# Altium PCB RGB_Plugin_Board.PcbDoc (part 1 of 3)
Units mil, origin at the board's own origin, x right, y up, seen from the top; angles counter-clockwise.
Board outline 2420 x 984.41 mil, 2 copper layers (TOP, BOTTOM), stack 81.54 mil thick; 20 components, 19 nets, 2525 pads, 9 vias.
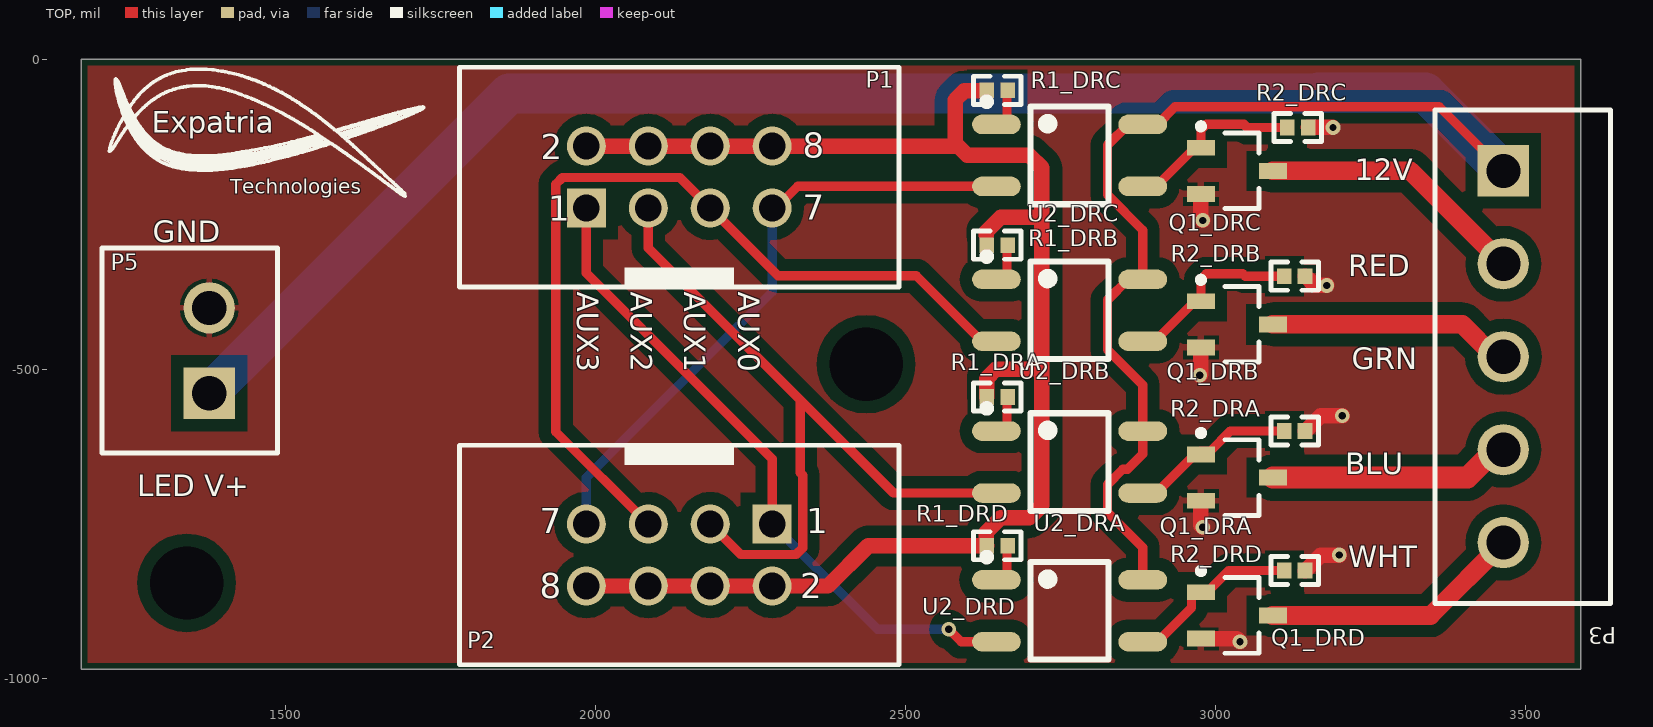
[diagram p0: TOP view]
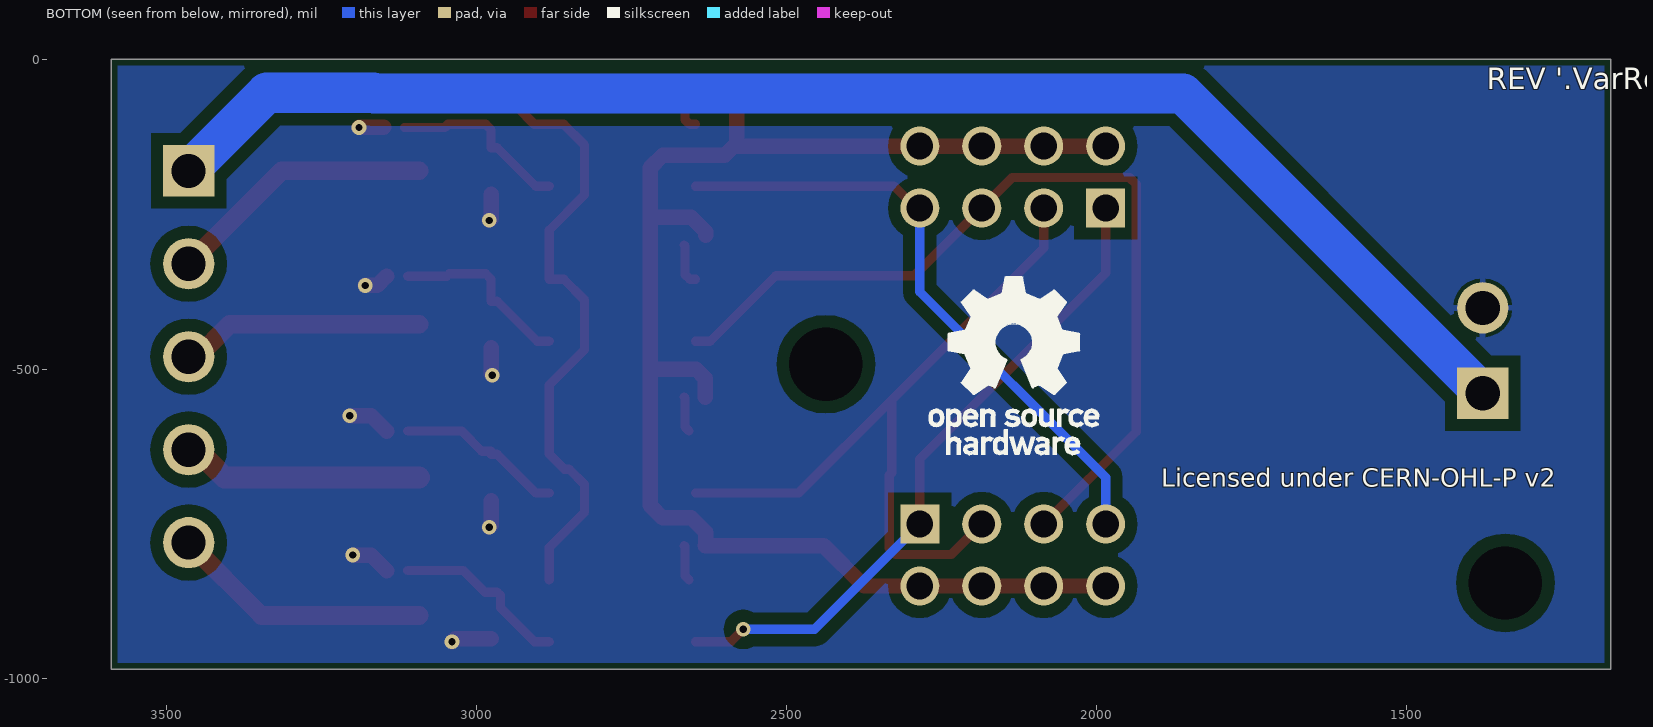
[diagram p1: BOTTOM view, seen from below]
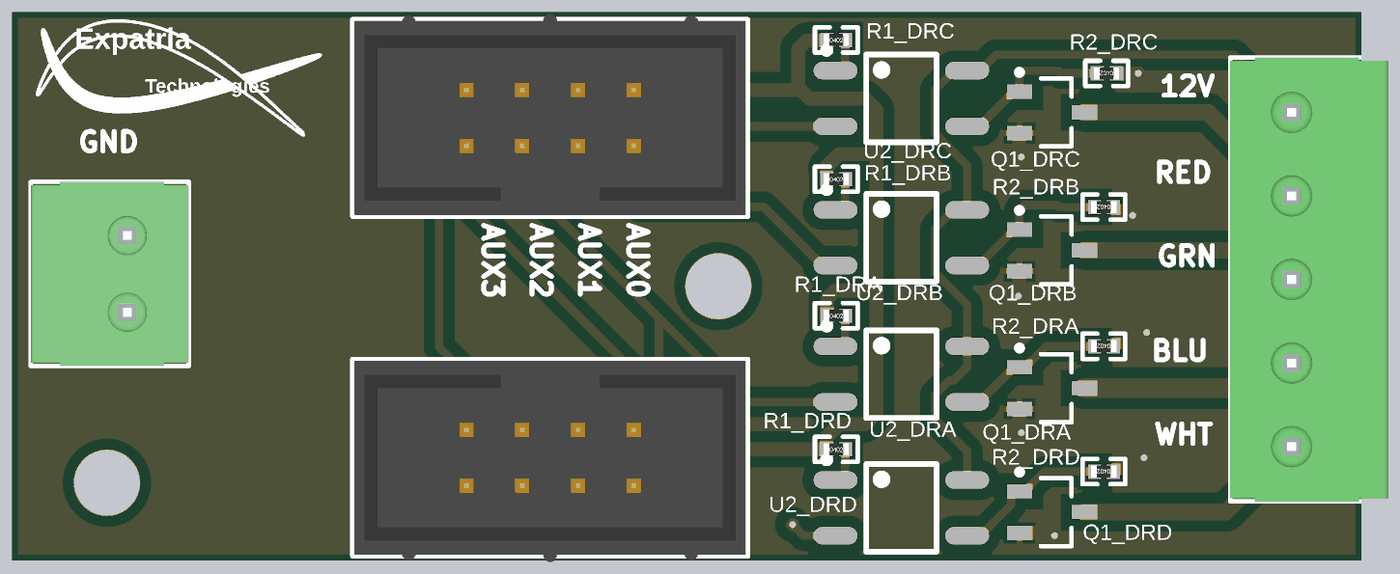
[diagram p4: 3D render of the assembled board from above, using the file's embedded part models]

## Layer stack, top to bottom
Top Solder: solder mask 0.4, Solder Resist, Dk 3.5
TOP: signal copper 1.4
Dielectric 1: core 78.74, FR-4, Dk 4.2
BOTTOM: signal copper 1.4
Bottom Solder: solder mask 0.4, Solder Resist, Dk 3.5

## Board outline
1170,-984.41 1170,0 3590,0 3590,-984.41

## Design rules (kind name [scope] priority, off if disabled: settings)
BoardOutlineClearance "BoardOutlineClearance Mousebites" [InPadClass('Debug_Tab_bites')] p1: gap=0 ignorepadtopadclearanceinfootprint=FALSE
BoardOutlineClearance "BoardOutlineClearance Silk" [(OnLayer('Top Overlay') OR OnLayer('Bottom Overlay'))] p2: gap=0 ignorepadtopadclearanceinfootprint=FALSE
BoardOutlineClearance [All] p3: gap=10 ignorepadtopadclearanceinfootprint=FALSE except(0: Arc-SplitContinuation Track-SplitContinuation SMDPad-SplitContinuation THPad-SplitContinuation Via-SplitContinuation Fill-SplitContinuation Poly-SplitContinuation Region-SplitContinuation Text-SplitContinuation)
Clearance "Fiducial self-clearance" [HasFootprint('Fiducial10-20') vs IsArc] p1: gap=5 ignorepadtopadclearanceinfootprint=TRUE except(0: Arc-SMDPad Arc-THPad Arc-Hole Track-SMDPad Track-THPad Track-Hole SMDPad-SMDPad SMDPad-THPad SMDPad-Hole THPad-THPad THPad-Hole Via-Hole Fill-Hole Poly-Hole Region-Hole Text-Hole; 4: Arc-Arc Arc-Track Arc-Via Arc-Text Track-Track Track-Via Track-Text SMDPad-Via SMDPad-Text THPad-Via THPad-Text Via-Via Via-Text Fill-Text Poly-Text Region-Text Text-Text)
Clearance "Board Outline" [InPolygon vs OnLayer('Keep-Out Layer')] p2: gap=15 ignorepadtopadclearanceinfootprint=FALSE except(0: Arc-Hole Track-Hole SMDPad-Hole THPad-Hole Via-Hole Fill-Hole Poly-Hole Region-Hole Text-Hole)
Clearance [All] p3: gap=20 ignorepadtopadclearanceinfootprint=TRUE except(10: Arc-Arc Arc-Track Arc-SMDPad Arc-THPad Arc-Via Track-Track Track-SMDPad Track-THPad Track-Via SMDPad-SMDPad SMDPad-THPad SMDPad-Via)
ComponentClearance "S1 Clearance" [InComponent('S1')] p1: gap=0 collisioncheckmode=3 verticalgap=10 showdistances=FALSE
ComponentClearance [All] p2: gap=0 collisioncheckmode=3 verticalgap=100000 showdistances=FALSE
DiffPairsRouting RF_100_Routing [InDifferentialPair('CSI0_CLK') or  InDifferentialPair('RANGE_RF')] p1: maxlimit=10 minlimit=5 mostfreqgap=5 toplayer_minwidth=5 toplayer_maxwidth=10 toplayer_prefwidth=5 bottomlayer_minwidth=5 bottomlayer_maxwidth=10 bottomlayer_prefwidth=5 maxuncoupledlength=250
DiffPairsRouting USB_D_Routing [InDifferentialPair('USB_HS_D') or InDifferentialPair('USB_HS_D_DEV') or  InDifferentialPair('C_USB_T_B') or InDifferentialPair('C_SBU')] p2: maxlimit=10 minlimit=5 mostfreqgap=5 toplayer_minwidth=3.2 toplayer_maxwidth=6.5 toplayer_prefwidth=6.5 bottomlayer_minwidth=3.2 bottomlayer_maxwidth=6.5 bottomlayer_prefwidth=6.5 maxuncoupledlength=250
DiffPairsRouting [All] p3: maxlimit=10 minlimit=5 mostfreqgap=10 toplayer_minwidth=5 toplayer_maxwidth=15 toplayer_prefwidth=15 bottomlayer_minwidth=5 bottomlayer_maxwidth=15 bottomlayer_prefwidth=15 maxuncoupledlength=500
FabricationTestPointUsage TestPointUsage [All] p1: valid=0 allowmultiple=FALSE
FabricationTestPointUsage TestPointUsage_1 [All] p2: valid=0 allowmultiple=FALSE
FabricationTestpoint Testpoint [All] p1: side=3 testpointundercomponent=TRUE minsize=40 maxsize=100 preferedsize=60 minholesize=0 maxholesize=40 preferedholesize=32 testpointgrid=1 allowsidetop=TRUE allowsidebottom=TRUE usegrid=TRUE gridtolerance=0.01
FabricationTestpoint Testpoint_1 [All] p2: side=3 testpointundercomponent=TRUE minsize=40 maxsize=100 preferedsize=60 minholesize=0 maxholesize=40 preferedholesize=32 testpointgrid=1 allowsidetop=TRUE allowsidebottom=TRUE usegrid=TRUE gridtolerance=0.01
FanoutControl Fanout_LCC [IsLCC] p1: bgadir=Out bgaviamode=Centered fanoutstyle=Auto fanoutdirection=Alternating viagrid=1 // Fanout_LCC (Default Rule)
FanoutControl Fanout_BGA [IsBGA] p2: bgadir=Out bgaviamode=Centered fanoutstyle=Auto fanoutdirection=Alternating viagrid=1 // Fanout_BGA (Default Rule)
FanoutControl Fanout_Default [All] p4: bgadir=Out bgaviamode=Centered fanoutstyle=Auto fanoutdirection=Alternating viagrid=1 // Fanout_Default (Default Rule)
FanoutControl Fanout_Small [(CompPinCount < 5)] p5: bgadir=Out bgaviamode=Centered fanoutstyle=Auto fanoutdirection=OutThenIn viagrid=1 // Fanout_Small (Default Rule)
FanoutControl Fanout_BGA_1 [IsBGA] p6: bgadir=Out bgaviamode=Centered fanoutstyle=Auto fanoutdirection=Alternating viagrid=1 // Fanout_BGA (Default Rule)
FanoutControl Fanout_LCC_1 [IsLCC] p7: bgadir=Out bgaviamode=Centered fanoutstyle=Auto fanoutdirection=Alternating viagrid=1 // Fanout_LCC (Default Rule)
FanoutControl Fanout_SOIC_1 [IsSOIC] p8: bgadir=Out bgaviamode=Centered fanoutstyle=Auto fanoutdirection=Alternating viagrid=1 // Fanout_SOIC (Default Rule)
FanoutControl Fanout_Small_1 [(CompPinCount < 5)] p9: bgadir=Out bgaviamode=Centered fanoutstyle=Auto fanoutdirection=OutThenIn viagrid=1 // Fanout_Small (Default Rule)
FanoutControl Fanout_Default_1 [All] p10: bgadir=Out bgaviamode=Centered fanoutstyle=Auto fanoutdirection=Alternating viagrid=1 // Fanout_Default (Default Rule)
HoleSize fpga_via [WithinRoom('FPGA_ROOM')] p1: absolutevalues=TRUE maxlimit=246 minlimit=3.94 maxpercent=80.000 minpercent=20.000
HoleSize [All] p2: absolutevalues=TRUE maxlimit=246 minlimit=5 maxpercent=80.000 minpercent=20.000
HoleToHoleClearance USBC_Hole_Clearance [InComponent('J3') vs InComponent('J3')] p1: gap=0 allowstackedmicrovias=TRUE
HoleToHoleClearance "Mousebite Hole Clearance" [InPadClass('Debug_Tab_bites') vs InPadClass('Debug_Tab_bites')] p2: gap=0 allowstackedmicrovias=TRUE
HoleToHoleClearance HoleToHoleClearance_J1 [InComponent('J1') vs InComponent('J1')] p3: gap=0 allowstackedmicrovias=TRUE
HoleToHoleClearance [All] p4: gap=9 allowstackedmicrovias=TRUE
LayerPairs LayerPairs_1 [All] p2: enforce=TRUE
MatchedLengths MatchLengths_xSignals_U4_U15 [InxSignalClass('xSignals_U4_U15_MatchLengthsClass')] p1: tolerance=100 checknetsindiffpair=FALSE checkdiffpairvsdiffpair=TRUE checkxsignals=TRUE checkothers=TRUE
MatchedLengths MatchLengths_xSignals_U4_U5 [InxSignalClass('xSignals_U4_U5_MatchLengthsClass')] p2: tolerance=100 checknetsindiffpair=FALSE checkdiffpairvsdiffpair=TRUE checkxsignals=TRUE checkothers=TRUE
MatchedLengths MatchLengths_xSignals_U2_U4 [InxSignalClass('xSignals_U2_U4_MatchLengthsClass')] p3: tolerance=100 checknetsindiffpair=FALSE checkdiffpairvsdiffpair=TRUE checkxsignals=TRUE checkothers=TRUE
MatchedLengths MatchLengths_xSignals_U4_U6 [InxSignalClass('xSignals_U4_U6_MatchLengthsClass')] p4: tolerance=50 checknetsindiffpair=FALSE checkdiffpairvsdiffpair=TRUE checkxsignals=TRUE checkothers=TRUE
MatchedLengths MatchLengths_xSignals_U4_U3 [InxSignalClass('xSignals_U4_U3_MatchLengthsClass')] p5: tolerance=50 checknetsindiffpair=FALSE checkdiffpairvsdiffpair=TRUE checkxsignals=TRUE checkothers=TRUE
MatchedLengths DRAM_Length [InNetClass('SDRAM Nets')] p6: tolerance=200 checknetsindiffpair=FALSE checkdiffpairvsdiffpair=TRUE checkxsignals=TRUE checkothers=TRUE
MatchedLengths "STM-FPGA Nets" [InNetClass('FPGA_CAM_NETS')] p7: tolerance=50 checknetsindiffpair=FALSE checkdiffpairvsdiffpair=TRUE checkxsignals=TRUE checkothers=TRUE
MinimumAnnularRing [All] p1: minimumring=1.97
PlaneClearance [All] p1: clearance=6
PlaneConnect StichingPlaneConnect [IsStitchingVia OR IsShieldingVia] p1: planeconnectstyle=Direct reliefexpansion=6 reliefentries=4 reliefconductorwidth=10 reliefairgap=6
PlaneConnect "U5 Plane Connect" [InComponent('U5') or InComponent('U4')] p2: planeconnectstyle=Direct reliefexpansion=6 reliefentries=4 reliefconductorwidth=10 reliefairgap=6
PlaneConnect [All] p3: planeconnectstyle=Direct reliefexpansion=6 reliefentries=4 reliefconductorwidth=10 reliefairgap=6
PolygonConnect FAN54005_gnd_conn [InComponent('C122') OR  InComponent('C119') OR InComponent('L6') OR InComponent('C120') OR InComponent('C129') OR InComponent('C131') OR InComponent('C121') OR  InComponent('C124') OR InComponent('L7') OR InComponent('C123') OR InComponent('C132') OR InComponent('C133') AND IsPad] p1: connectstyle=Direct reliefconductorwidth=10 reliefentries=4 polygonreliefangle="90 Angle" airgapwidth=6 // Direct connect for FAN540005 connect as per reference design
PolygonConnect "Wifi Antenna Ground" [InComponent('A2') OR InComponent('U15')] p2: connectstyle=Direct reliefconductorwidth=10 reliefentries=4 polygonreliefangle="90 Angle" airgapwidth=6 // Direct connect for FAN540005 connect as per reference design
PolygonConnect "Ground Polygon Connect" [IsVia vs IsPolygon] p3: connectstyle=Direct reliefconductorwidth=10 reliefentries=4 polygonreliefangle="90 Angle" airgapwidth=10
PolygonConnect "RF Polygon Connect" [InNet('GND') And IsVia] p4: connectstyle=Direct reliefconductorwidth=10 reliefentries=4 polygonreliefangle="90 Angle" airgapwidth=10
PolygonConnect "D3 Polygon Connect" [InComponent('D3') And IsComponentPad] p5: connectstyle=Direct reliefconductorwidth=10 reliefentries=4 polygonreliefangle="90 Angle" airgapwidth=10
PolygonConnect "U4 Polygon Connect" [InComponent('U4') And IsComponentPad] p6: connectstyle=Direct reliefconductorwidth=10 reliefentries=4 polygonreliefangle="90 Angle" airgapwidth=10
PolygonConnect "P1 Polygon Connect" [(InComponent('P1') or InComponent('P2')) And IsComponentPad] p7: connectstyle=Direct reliefconductorwidth=10 reliefentries=4 polygonreliefangle="90 Angle" airgapwidth=10
PolygonConnect "Pad Polygon Connect" [IsComponentPad and InNet('GND')] p8: connectstyle=Relief reliefconductorwidth=10 reliefentries=4 polygonreliefangle="90 Angle" airgapwidth=6
PolygonConnect "Default Polygon Connect" [All] p9: connectstyle=Direct reliefconductorwidth=10 reliefentries=4 polygonreliefangle="45 Angle" airgapwidth=6
RoomDefinition DRD [InComponentClass('DRD')] p1: confinementstyle=ConfineIn formatcopy=TRUE lockcomponents=FALSE outline 2585,-970 3160,-970 3160,-755 2585,-755
RoomDefinition DRC [InComponentClass('DRC')] p2: confinementstyle=ConfineIn formatcopy=TRUE lockcomponents=FALSE outline 2585,-235 3160,-235 3160,-20 2585,-20
RoomDefinition DRB [InComponentClass('DRB')] p3: confinementstyle=ConfineIn formatcopy=TRUE lockcomponents=FALSE outline 2585,-485 3160,-485 3160,-270 2585,-270
RoomDefinition DRA [InComponentClass('DRA')] p4: confinementstyle=ConfineIn formatcopy=TRUE lockcomponents=FALSE outline 2585,-730 3160,-730 3160,-515 2585,-515
RoutingVias BGA_RoutingVias [All] p1: holewidth=6 width=10 viastyle="Through Hole" minholewidth=6 minwidth=10 maxholewidth=20 maxwidth=40
RoutingVias [All] p2: holewidth=8 width=18 viastyle="Through Hole" minholewidth=8 minwidth=18 maxholewidth=25 maxwidth=40
ShortCircuit "RF Antenna" [InNet('NetA2_1') vs InNet('GND')] p1: allowed=TRUE
ShortCircuit [All] p2: allowed=FALSE
SilkToSolderMaskClearance SilkscreenOverComponentPads [IsPad] p1: minsilkscreentomaskgap=10 clearancetoexposedcopper=TRUE
SolderMaskExpansion [All] p1: expansion=1 istentingtop=FALSE
ViasUnderSMD [All] p1: allowed=FALSE
Width FPGA_Width [WithinRoom('FPGA_ROOM')] p1 off: maxlimit=5 minlimit=2.76 preferedwidth=5 minimp=50.000000 maximp=50.000000 favimp=50.000000
Width USB_D_Width [InDifferentialPair('USB_HS_D') or InDifferentialPair('USB_HS_D_DEV')] p2 off: maxlimit=6.5 minlimit=6.5 preferedwidth=6.5 checkconnectedcopper=TRUE
Width RF_50_Width [InNetClass('RF')] p3 off: maxlimit=118.59 minlimit=13.96 preferedwidth=118.59 toplayer_maxwidth=13.96 toplayer_prefwidth=13.96 bottomlayer_minwidth=118.59 minimp=50.000000 maximp=50.000000 favimp=50.000000 // 50 ohm nets
Width [All] p4: maxlimit=200 minlimit=10 preferedwidth=10 minimp=50.000000 maximp=50.000000 favimp=50.000000
16 further rules are at their usual default settings.

## Classes and differential pairs
component class DRD: Q1_DRD R1_DRD R2_DRD U2_DRD
channel class LED_STRIP_DRIVER: DRA DRB DRC DRD
component class DRC: Q1_DRC R1_DRC R2_DRC U2_DRC
component class DRB: Q1_DRB R1_DRB R2_DRB U2_DRB
component class DRA: Q1_DRA R1_DRA R2_DRA U2_DRA
component class RGB_Plugin_Board: P1 P2 P3 P5

## Components (designator, comment, footprint, x,y, rotation, side; value= is the part's Value field where it differs from the comment)
P1 "C9135" 61200821621 2135,-190 r0 top
P2 "C9135" 61200821621 2135,-800 r180 top
P3 "691321300005" 691321300005 3496.5,-480 r270 top
P5 "691321100002" 691321100002 1345,-470 r90 top
Q1_DRA "AO3400A N" SOT-23-3L 3035,-675 r180 top (schematic designator Q1)
Q1_DRB "AO3400A N" SOT-23-3L 3035,-427.74 r180 top (schematic designator Q1)
Q1_DRC "AO3400A N" SOT-23-3L 3035,-180 r180 top (schematic designator Q1)
Q1_DRD "AO3400A N" SOT-23-3L 3035,-897.6 r180 top (schematic designator Q1)
R1_DRA "1KΩ ±1%" 0402_R 2648.27,-545 r0 top (schematic designator R1)
R1_DRB "1KΩ ±1%" 0402_R 2648.27,-300 r0 top (schematic designator R1)
R1_DRC "1KΩ ±1%" 0402_R 2648.27,-50 r0 top (schematic designator R1)
R1_DRD "1KΩ ±1%" 0402_R 2648.27,-785 r0 top (schematic designator R1)
R2_DRA "10KΩ ±1%" 0402_R 3128.27,-600 r180 top (schematic designator R2)
R2_DRB "10KΩ ±1%" 0402_R 3128.27,-350 r180 top (schematic designator R2)
R2_DRC "10KΩ ±1%" 0402_R 3133.27,-110 r180 top (schematic designator R2)
R2_DRD "10KΩ ±1%" 0402_R 3128.27,-825 r180 top (schematic designator R2)
U2_DRA "EL357N(B)(TA)-G" SOP-4_P2.54 2765,-650 r0 top (schematic designator U2)
U2_DRB "EL357N(B)(TA)-G" SOP-4_P2.54 2765,-405 r0 top (schematic designator U2)
U2_DRC "EL357N(B)(TA)-G" SOP-4_P2.54 2765,-155 r0 top (schematic designator U2)
U2_DRD "EL357N(B)(TA)-G" SOP-4_P2.54 2765,-890 r0 top (schematic designator U2)

## Footprints (in the part's own frame and the unit in brackets; to place one, negate y for a bottom-side part, rotate by r counter-clockwise, add the part's x,y. Pads: shape width x height; smd on the part's side, far side on the other; paste and mask are expansions set on the pad)
0402_R [mm]
  rect 0.6x0.65 smd mask+0.051: 1(-0.425,0) 2(0.425,0)
  silkscreen extent -0.98,-0.58 0.98,0.58, body extent -0.57,-0.27 0.58,0.28, height 0.41
61200821621 [mm] "8 pins, straight, gold plating"
  rect 1.6x1.6 hole 1.1: 1(-3.81,-1.27)
  round 1.6 hole 1.1: 2(-3.81,1.27) 3(-1.27,-1.27) 4(-1.27,1.27) 5(1.27,-1.27) 6(1.27,1.27) 7(3.81,-1.27) 8(3.81,1.27)
  silkscreen extent -9.01,-4.5 9.01,4.5, body extent -8.91,-4.42 8.91,4.75, height 9.13
691321100002 [mm] "Vertical PCB Header, pitch 3.5mm, 02p"
  rect 2.1x2.1 hole 1.4: 1(-1.75,-0.8)
  round 2.1 hole 1.4: 2(1.75,-0.8)
  silkscreen extent -4.2,-3.6 4.2,3.6, body extent -4.2,-3.6 4.2,3.6, height 9.3
691321300005 [mm] "Vertical PCB Header, pitch 3.81mm, 05p"
  rect 2.1x2.1 hole 1.4: 1(-7.62,-0.8)
  round 2.1 hole 1.4: 2(-3.81,-0.8) 3(0,-0.8) 4(3.81,-0.8) 5(7.62,-0.8)
  silkscreen extent -10.12,-3.6 10.12,3.6, body extent -10.12,-3.6 10.12,3.6, height 9.25
SOP-4_P2.54 [mm]
  oval 2x0.8 smd: 1(-3,1.27) 2(-3,-1.27) 3(3,-1.27) 4(3,1.27)
  silkscreen extent -3.55,-2 1.6,2.35
SOT-23-3L [mm] "http://www.aosmd.com/res/packaging_information/SOT-23-3L.pdf"
  rect 1.15x0.65 smd: 1(1.475,-0.95) 2(1.475,0.95) 3(-1.475,0)
  silkscreen extent -0.9,-1.95 1.6,1.55, body extent -0.9,-1.55 0.9,1.55, height 1.25

## Part data
P1 P2: library part CMP-1502-00006-1, "Male Box Header WR-BHD, THT, Vertical, pitch 2.54 mm, 8 pins", Manufacturer="Wurth Elektronik", Package Reference=61200821621, Packaging=Tray, Part Number=C9135, Pitch=2.54mm, Published Date=August2018, Publisher=WurthElektronik, SuppliersPartNumber=C9135
P3: library part CMP-1502-01866-1, "Serie 321 - 3.81mm Vertical PCB Header WR-TBL, 5 pin", Manufacturer="Wurth Elektronik", Operating Temperature=-40to105degC, Datasheet URL=http://katalog.we-online.de/em/datasheet/6913213000xx.pdf, Gender=Male, Manufacturer URL=http://www.we-online.de, Mounting Technology=THT, Package Reference=691321300005, Packaging=Box, Part Number=691321300005, Pin Number=5, Pitch=3.81mm, Publisher=WurthElektronik
P5: library part CMP-1502-01783-1, "Serie 3211 - 3.50mm Vertical PCB Header WR-TBL, 2 pin", Manufacturer="Wurth Elektronik", Operating Temperature=-40to105degC, Datasheet URL=http://katalog.we-online.de/em/datasheet/6913211000xx.pdf, Gender=Male, Manufacturer URL=http://www.we-online.de, Mounting Technology=THT, Package Reference=691321100002, Packaging=Box, Part Number=691321100002, Pin Number=2, Pitch=3.50mm, Publisher=WurthElektronik
Q1_DRA Q1_DRB Q1_DRC Q1_DRD: library part "AO3400A N道沟 X0YV1T SOT-23", "MOS(场效应管)", Package=SOT-23, SuppliersPartNumber=C20917, ComponentLink1Description=供应商链接, ComponentLink1URL=http://www.szlcsc.com/product/details_21629.html, Supplier=LC
R1_DRA R1_DRB R1_DRC R1_DRD: library part "0402 1K (1001) 1%", "Chip resistor", Manufacturer="Uniroyal Elec", Package=0402, PartNumber=0402WGF1001TCE, Power=1/16W, Resistance=1KΩ, SuppliersPartNumber=C11702, Tolerance=1%, ComponentLink1Description="Supplier link", ComponentLink1URL=http://www.szlcsc.com/product/details_12256.html, Supplier=LC
R2_DRA R2_DRB R2_DRC R2_DRD: library part "0402 10K (1002) 1%", "Chip resistor", Manufacturer="Uniroyal Elec", Package=0402, PartNumber=0402WGF1002TCE, Power=1/16W, Resistance=10KΩ, SuppliersPartNumber=C25744, Tolerance=1%, ComponentLink1Description="Supplier link", ComponentLink1URL=http://www.szlcsc.com/product/details_26487.html, Supplier=LC
U2_DRA U2_DRB U2_DRC U2_DRD: library part EL357N(B)(TA)-G_[C6649], "Optocoupler SOP-4, EL357N(B)(TA)-G, Everlight Electronics", Manufacturer 1=Everlight, Package=SOP-4_P2.54, SuppliersPartNumber=C6649, ComponentLink1Description=供应商链接, ComponentLink1URL=http://www.szlcsc.com/product/details_7114.html, Manufacturer Part Number 1=EL357N(B)(TA)-G, Supplier=LC